# Altium PCB ADC(1).PcbDoc
Units mm, origin at the board's own origin, x right, y up, seen from the top; angles counter-clockwise.
Board outline 152.4 x 101.6 mm, 20 copper layers (F.Cu, F.Mask, B.Cu, B.Mask, In1.Cu, F.SilkS, In2.Cu, B.SilkS, F.Adhes, B.Adhes, F.Paste, B.Paste, Dwgs.User, Cmts.User, Eco1.User, Eco2.User, Edge.Cuts, Margin, B.CrtYd, F.CrtYd); 28 components, 48 nets, 160 pads, 53 vias.
Unrouted connection lines stored in the file: 36.
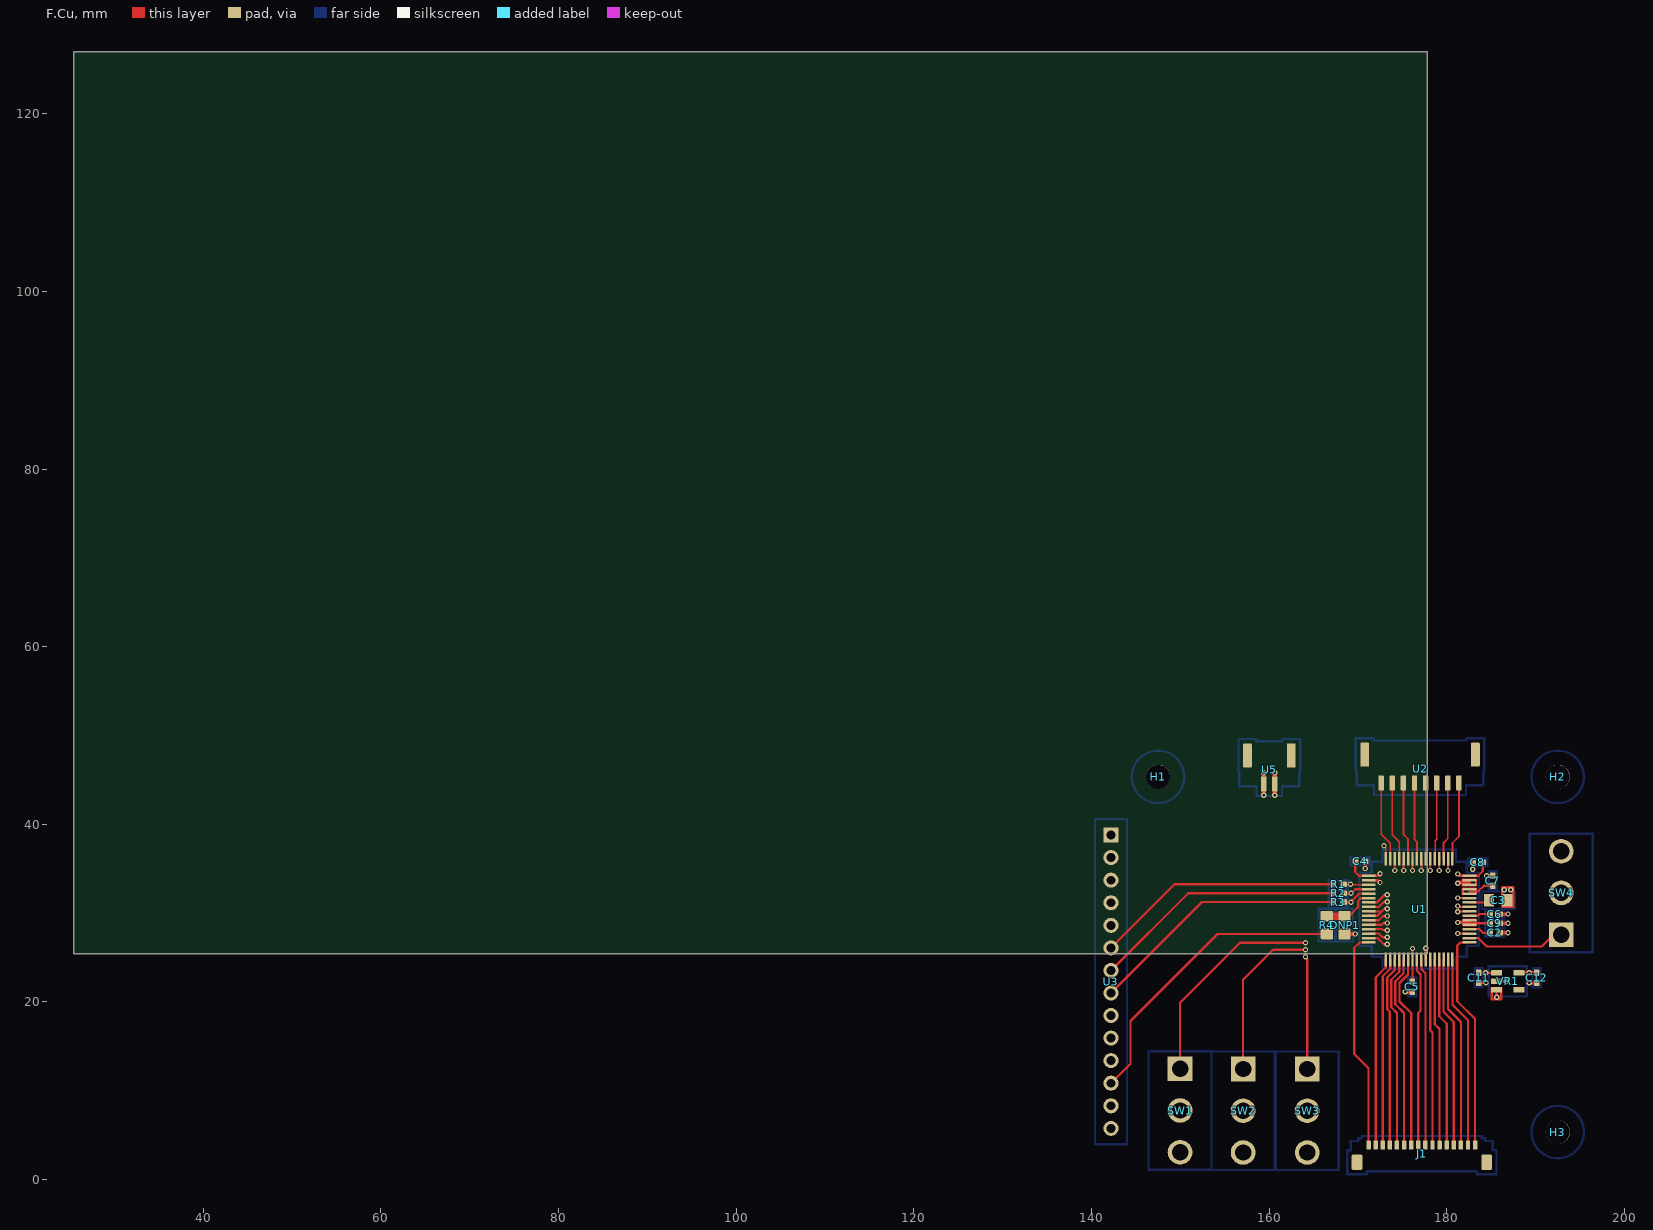
[diagram p0: F.Cu view]
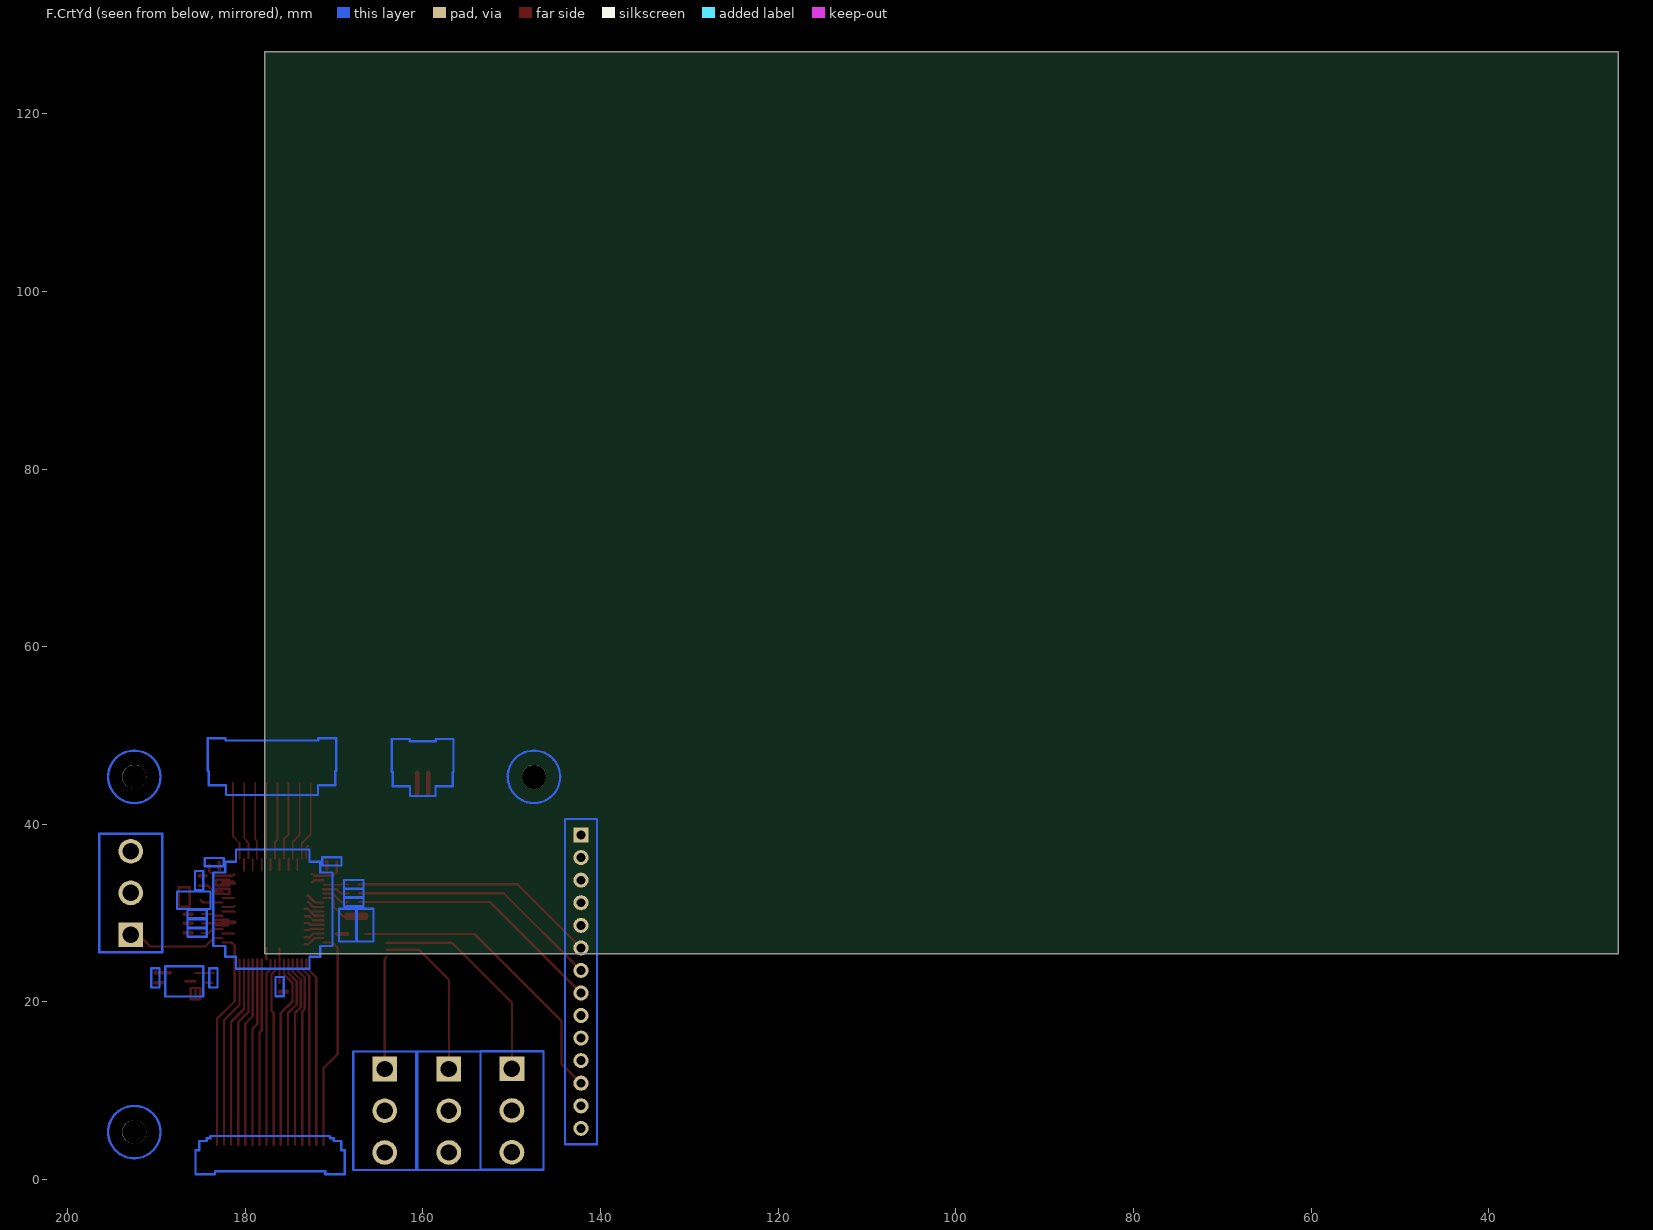
[diagram p1: F.CrtYd view, seen from below]
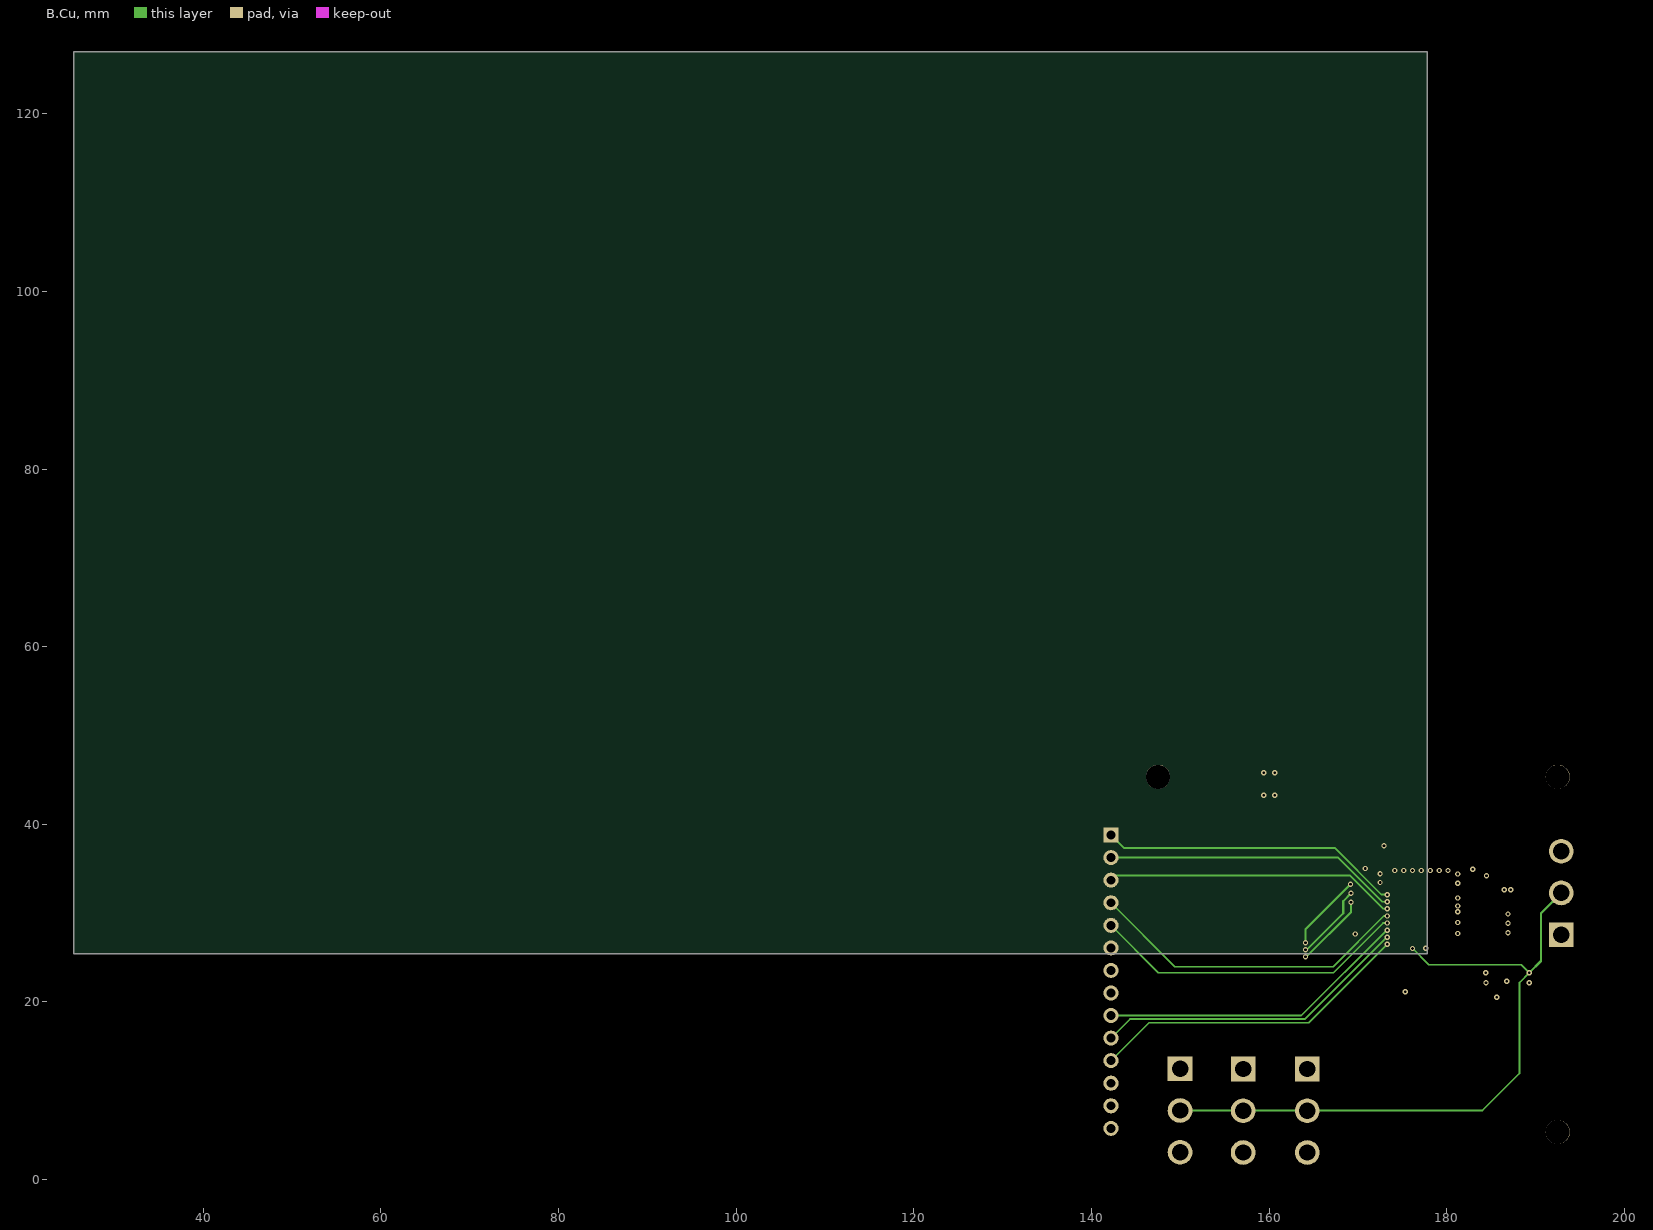
[diagram p2: B.Cu]
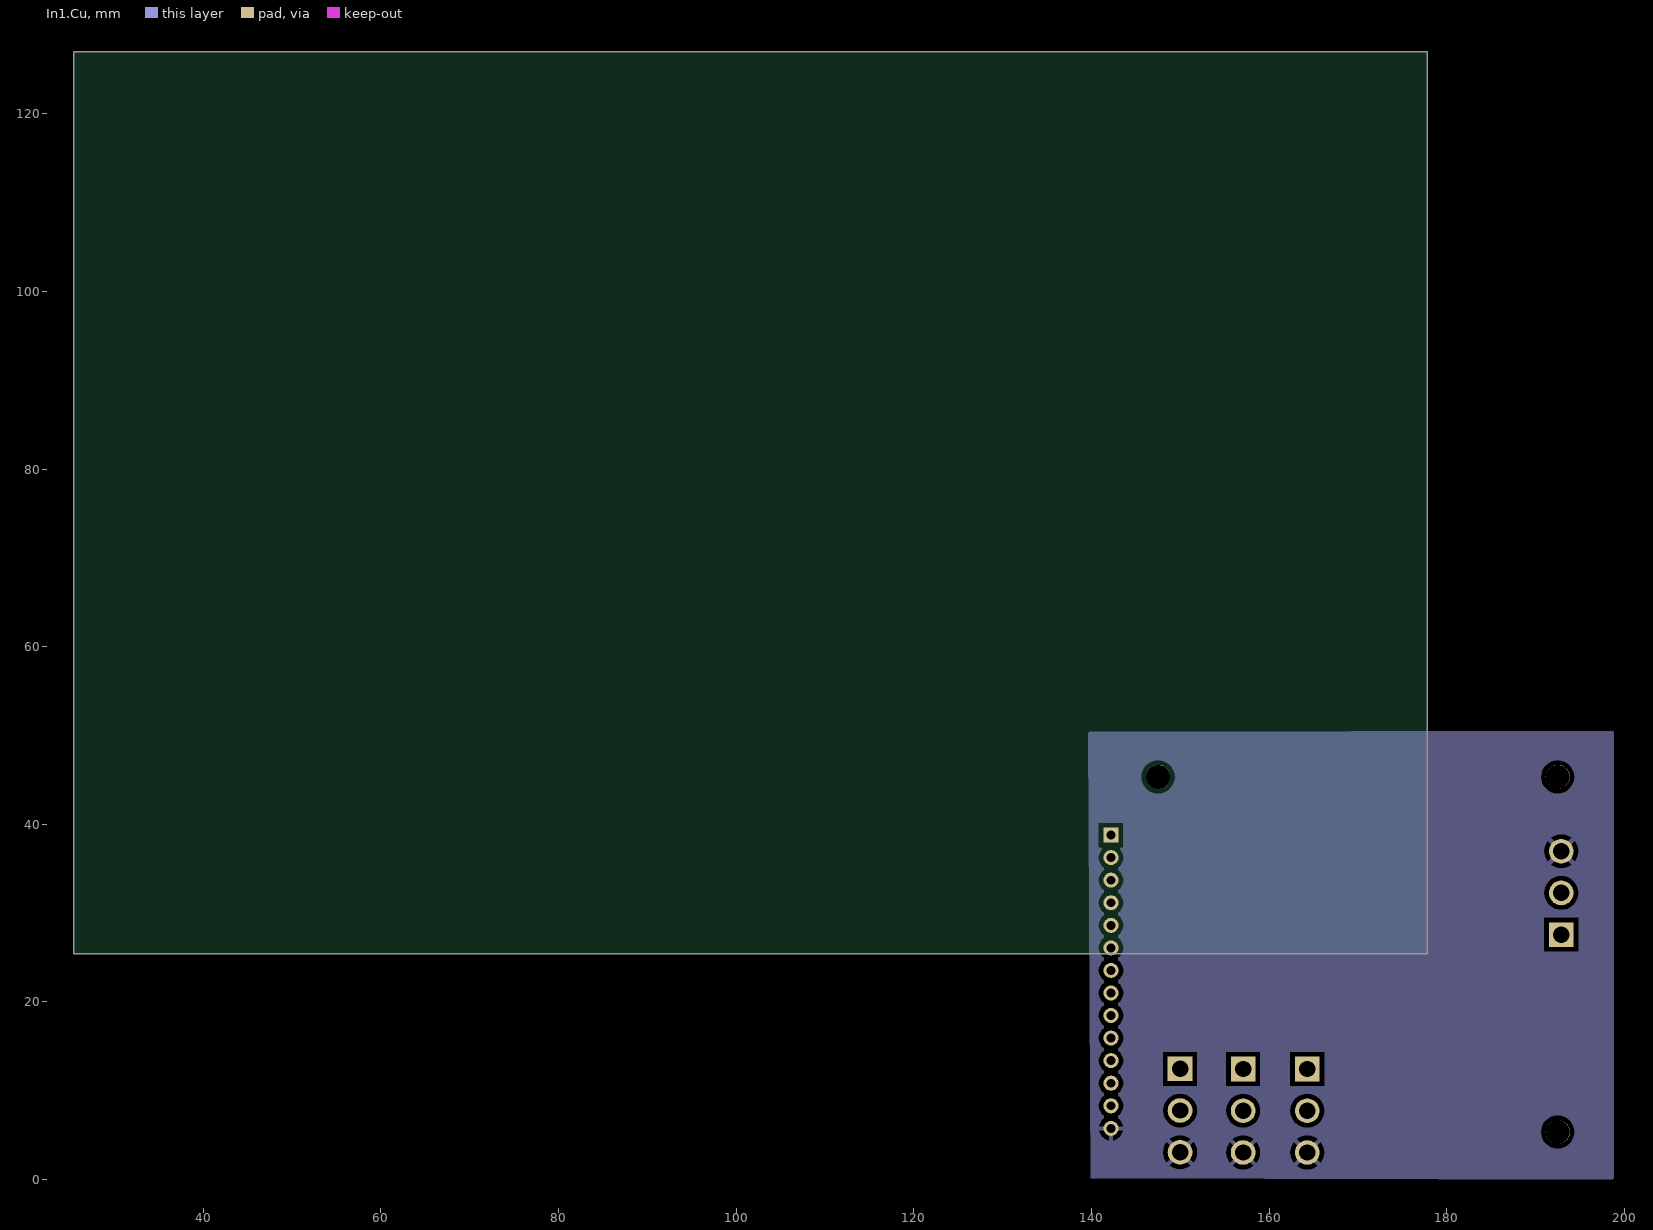
[diagram p3: In1.Cu]
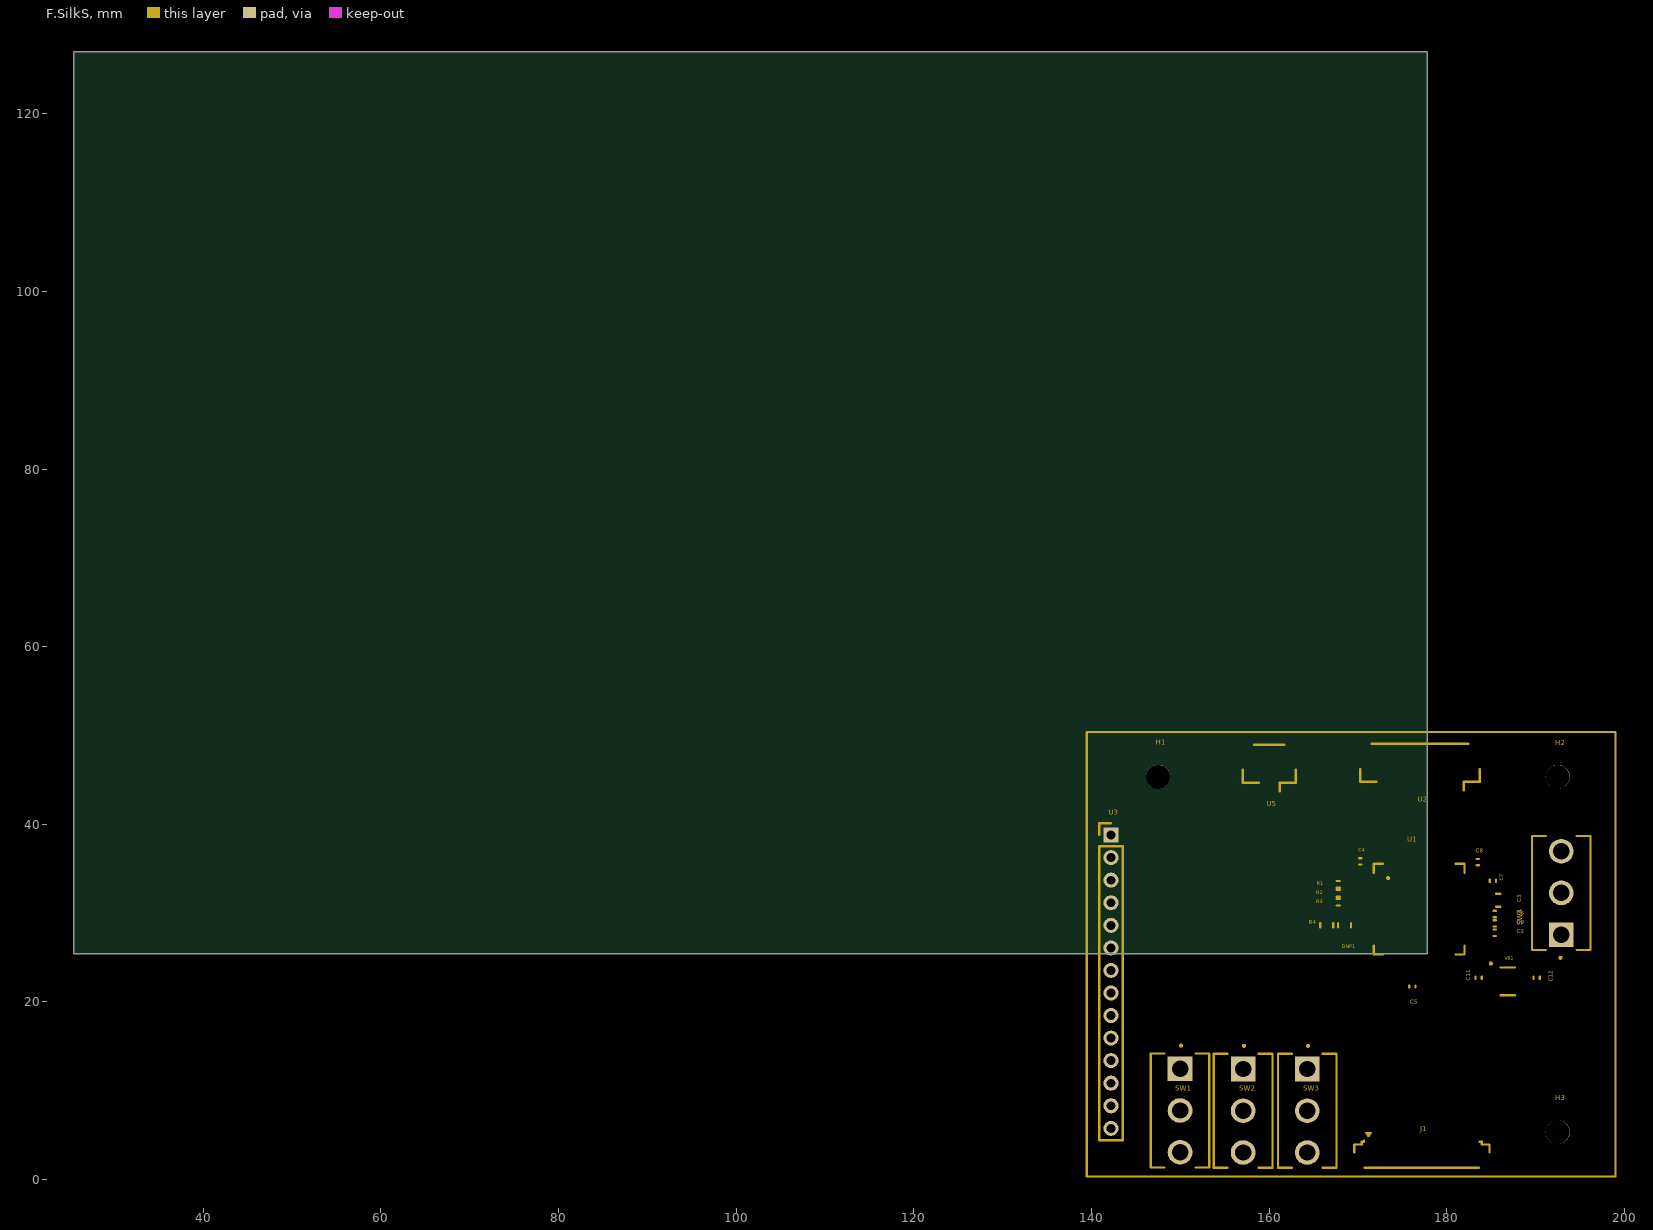
[diagram p4: F.SilkS]
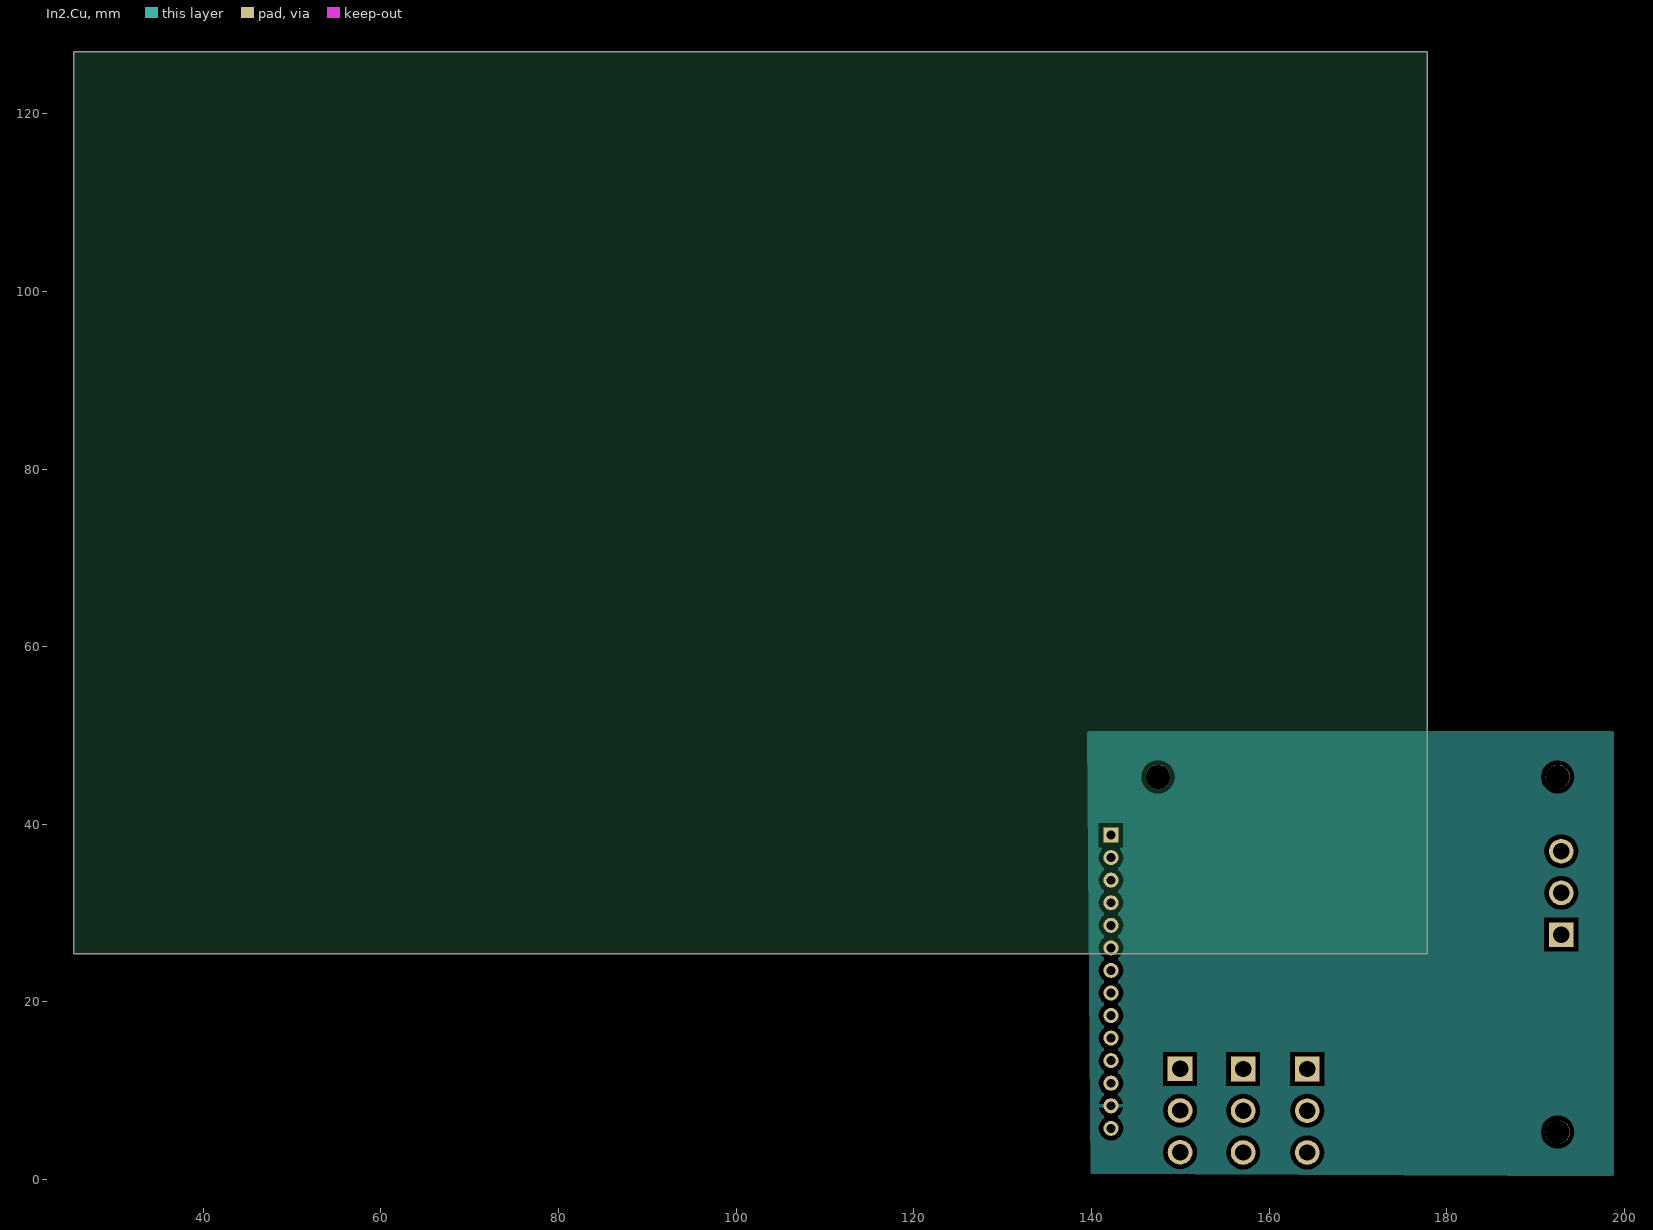
[diagram p5: In2.Cu]
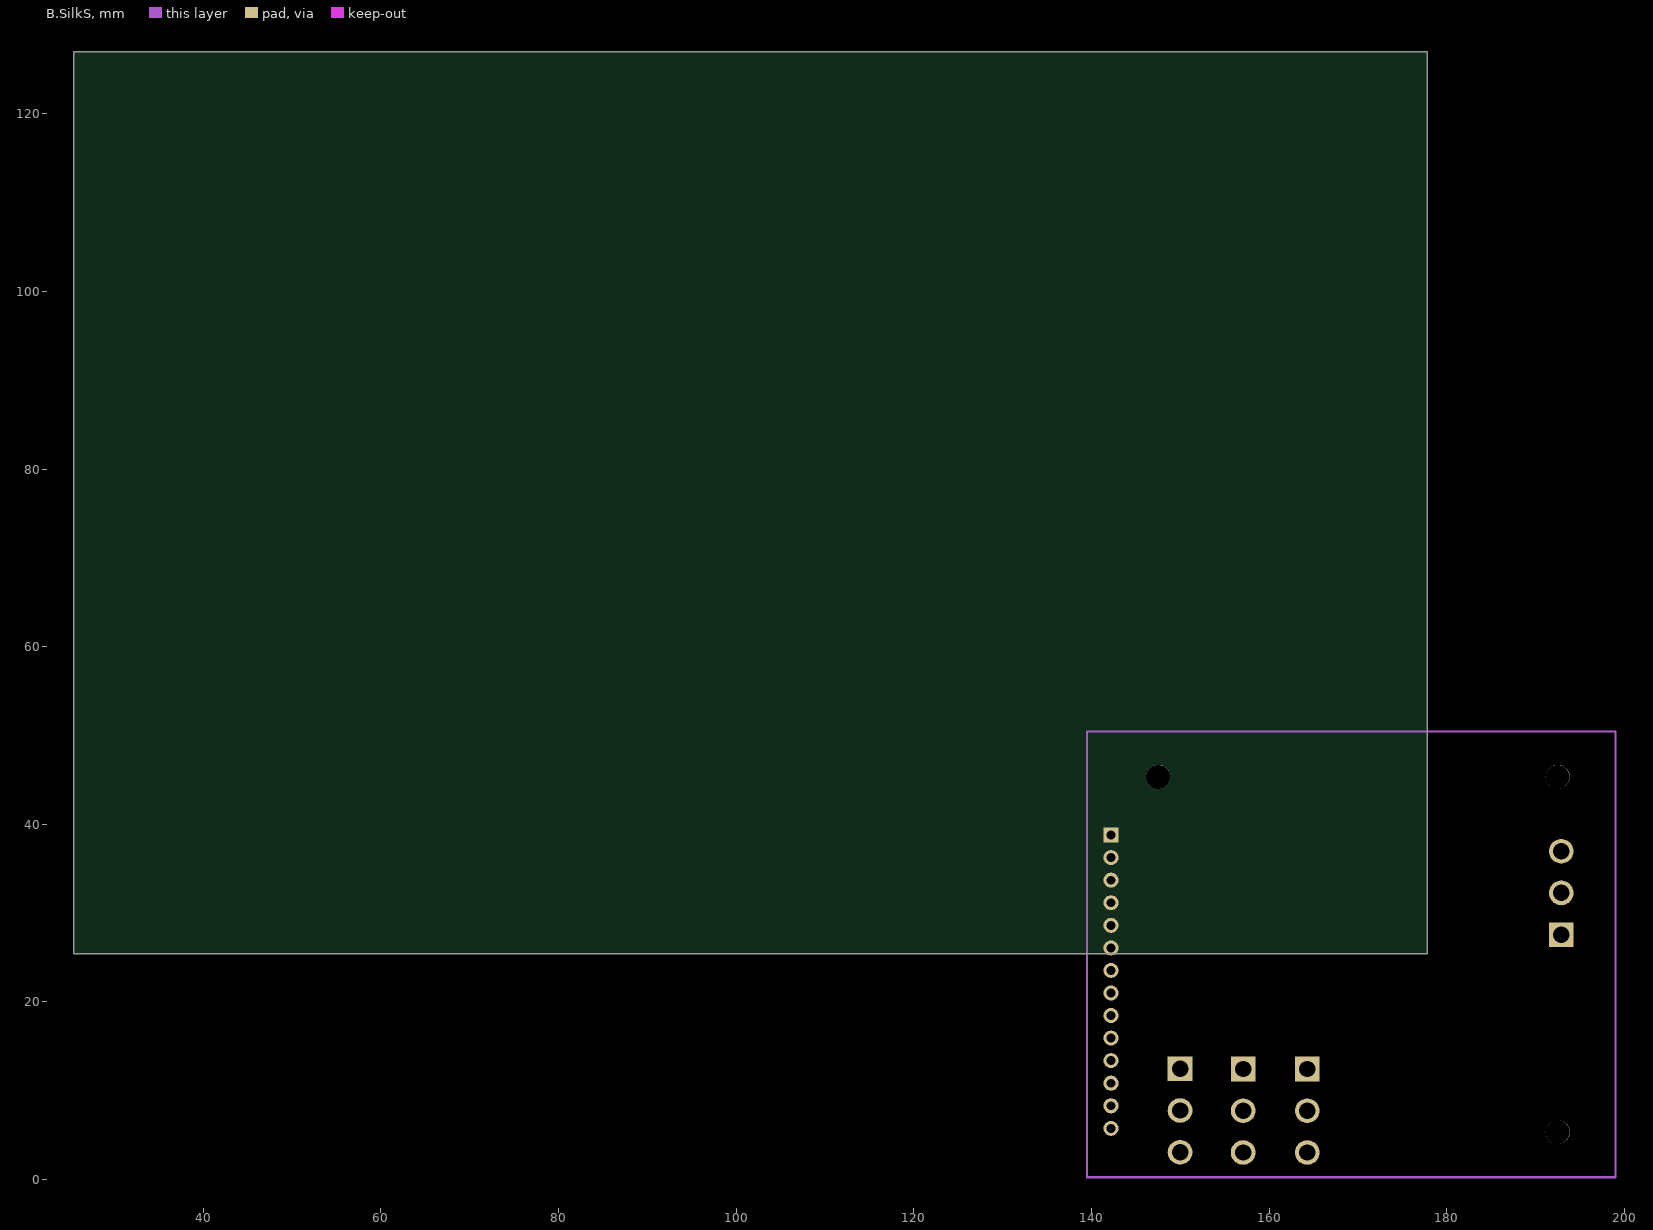
[diagram p6: B.SilkS]
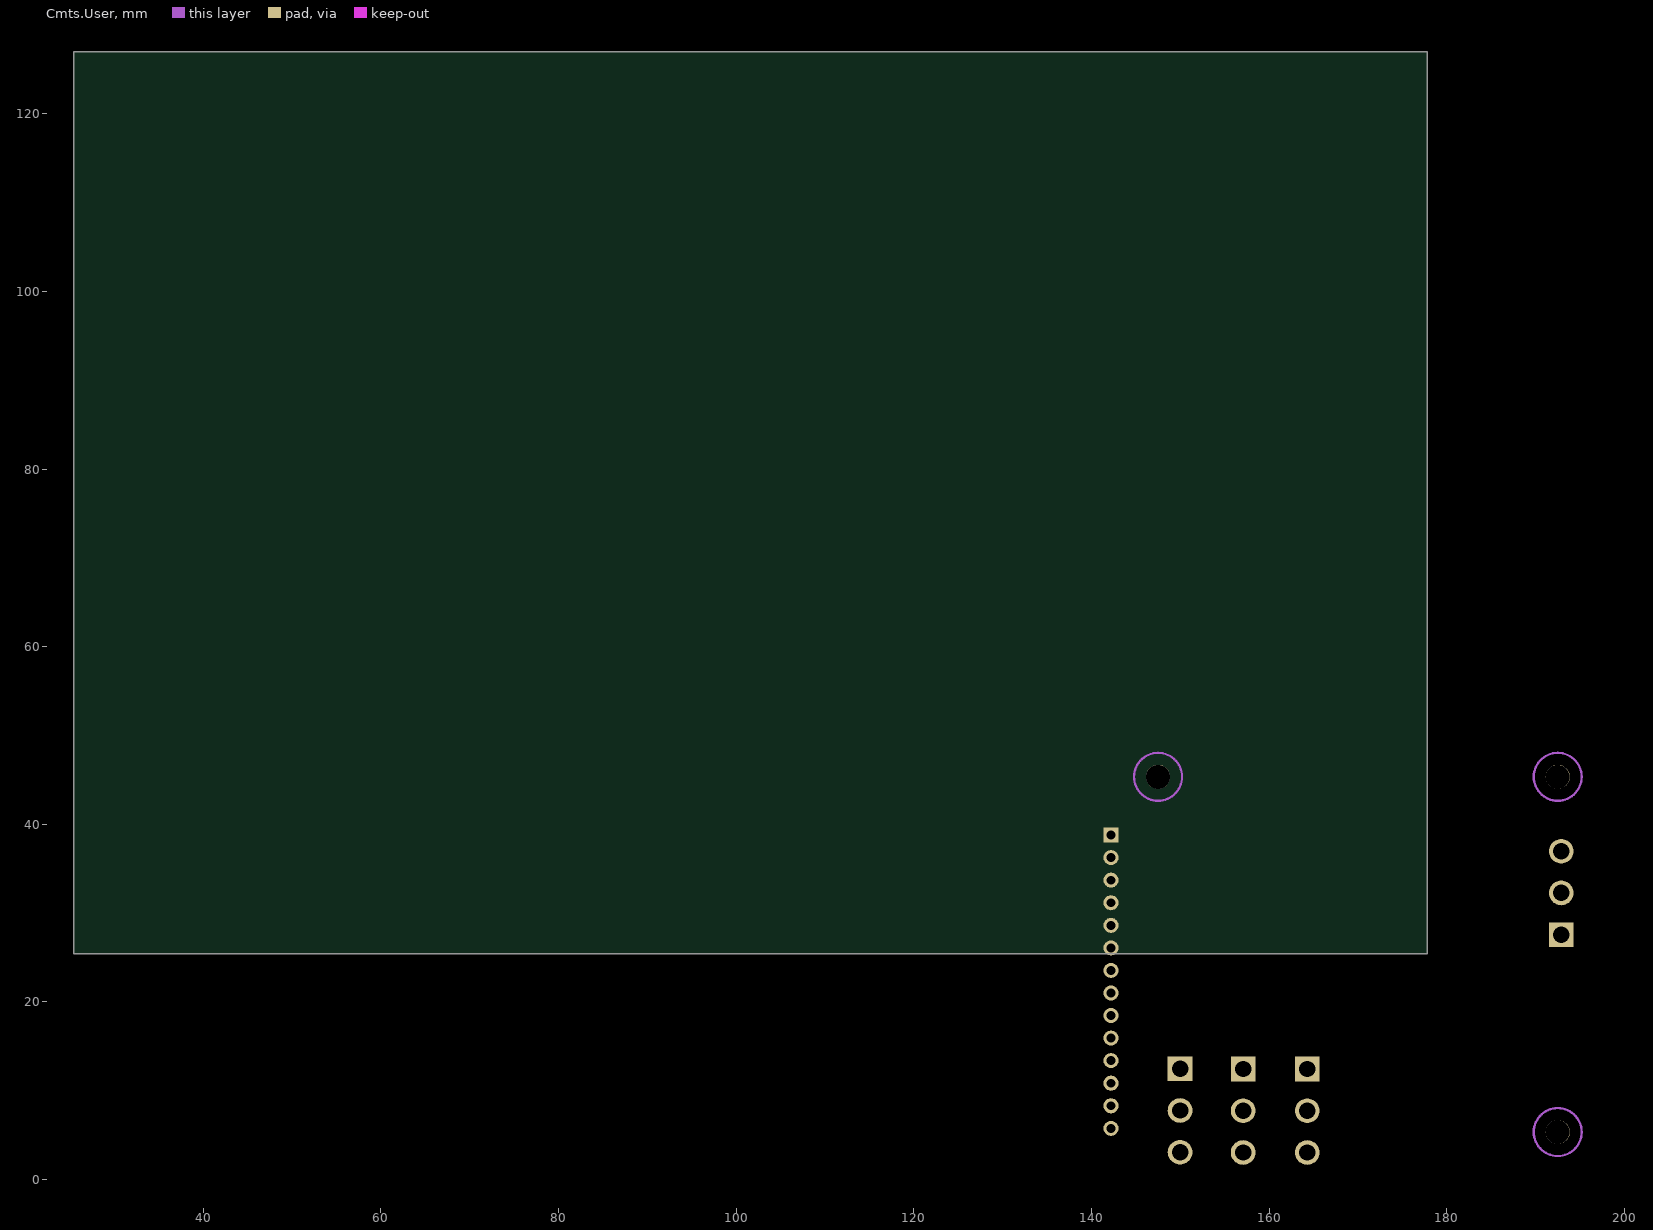
[diagram p7: Cmts.User]
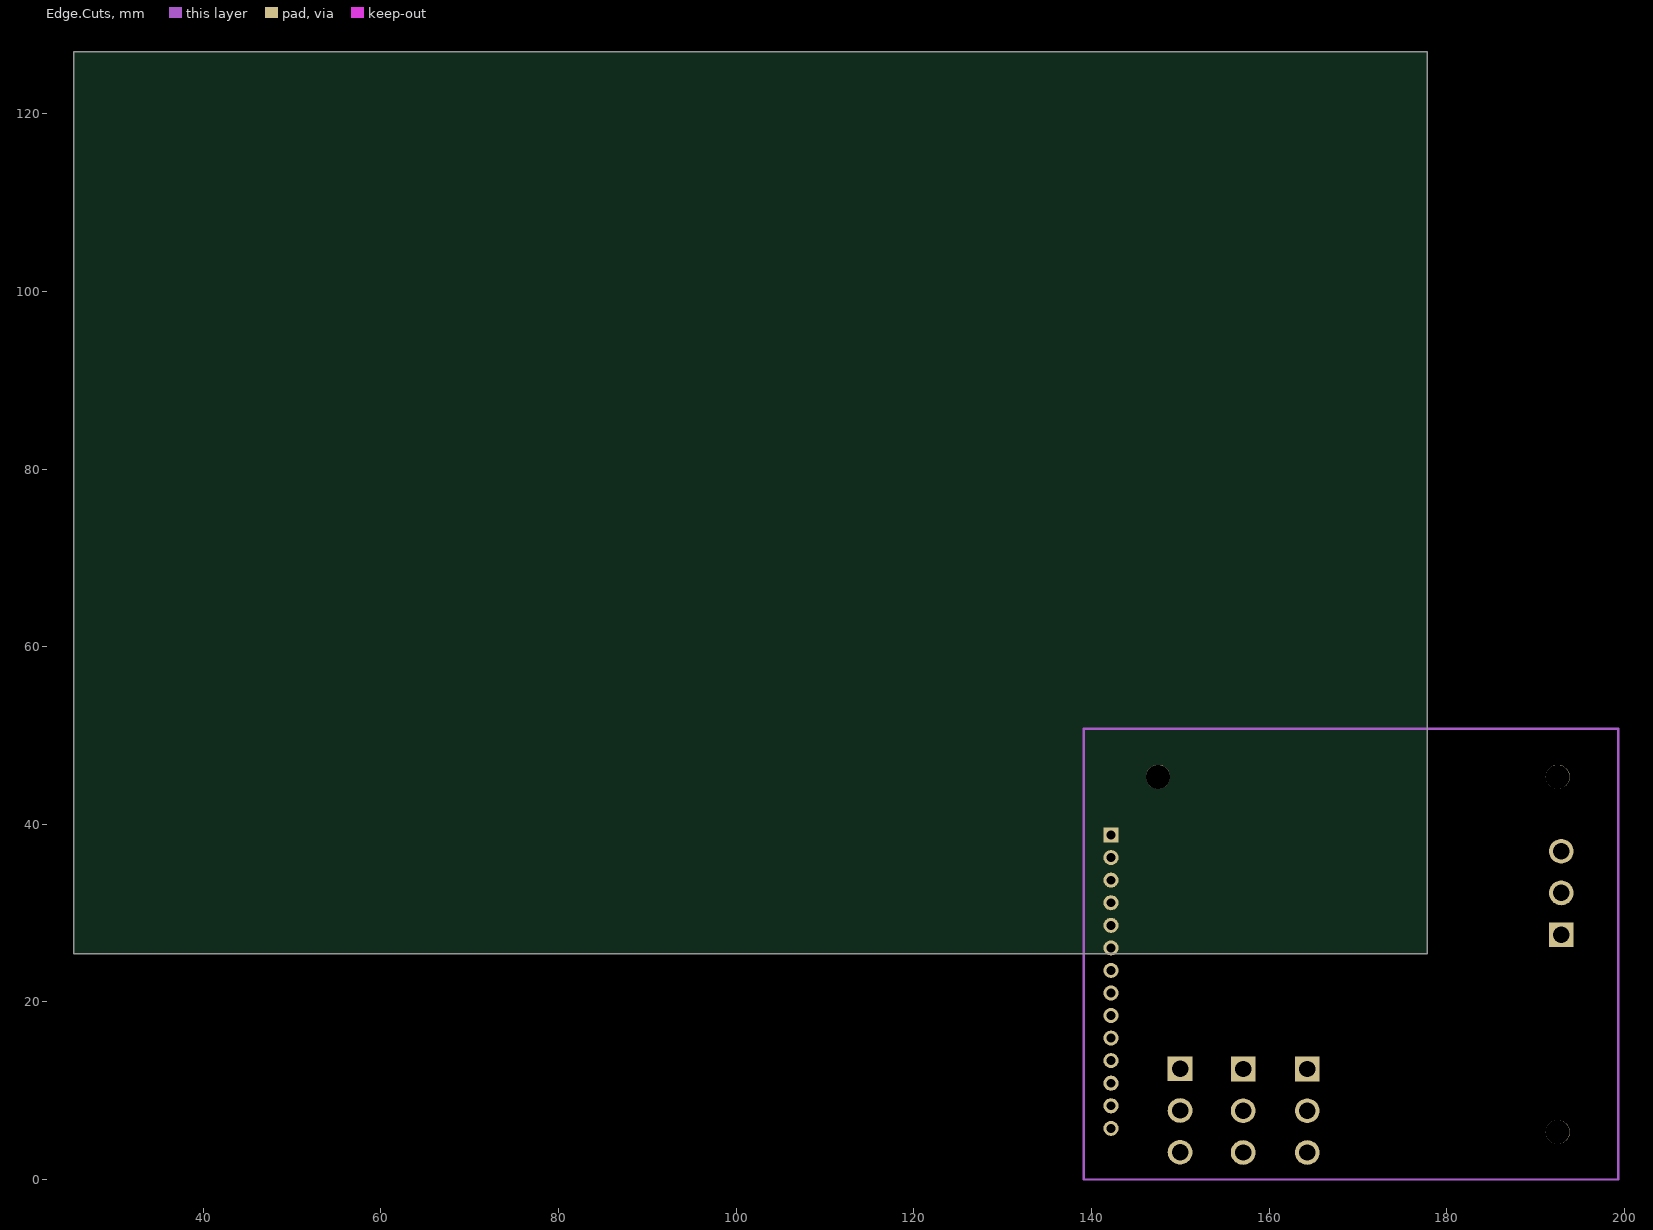
[diagram p8: Edge.Cuts]

## Layer stack, top to bottom
Top Solder: solder mask 0.0102, Solder Resist, Dk 3.5
F.Cu: signal copper 0.0356
Dielectric 1: dielectric 0.32, FR-4, Dk 4.8
F.Mask: signal copper 0.0356
Dielectric2: dielectric 0.32, FR-4, Dk 4.8
B.Cu: signal copper 0.0356
Dielectric3: dielectric 0.32, FR-4, Dk 4.8
B.Mask: signal copper 0.0356
Dielectric4: dielectric 0.32, FR-4, Dk 4.8
In1.Cu: signal copper 0.0356
Dielectric5: dielectric 0.32, FR-4, Dk 4.8
F.SilkS: signal copper 0.0356
Dielectric6: dielectric 0.32, FR-4, Dk 4.8
In2.Cu: signal copper 0.0356
Dielectric7: dielectric 0.32, FR-4, Dk 4.8
B.SilkS: signal copper 0.0356
Dielectric8: dielectric 0.32, FR-4, Dk 4.8
F.Adhes: signal copper 0.0356
Dielectric9: dielectric 0.32, FR-4, Dk 4.8
B.Adhes: signal copper 0.0356
Dielectric10: dielectric 0.32, FR-4, Dk 4.8
F.Paste: signal copper 0.0356
Dielectric11: dielectric 0.32, FR-4, Dk 4.8
B.Paste: signal copper 0.0356
Dielectric12: dielectric 0.32, FR-4, Dk 4.8
Dwgs.User: signal copper 0.0356
Dielectric13: dielectric 0.32, FR-4, Dk 4.8
Cmts.User: signal copper 0.0356
Dielectric14: dielectric 0.32, FR-4, Dk 4.8
Eco1.User: signal copper 0.0356
Dielectric15: dielectric 0.32, FR-4, Dk 4.8
Eco2.User: signal copper 0.0356
Dielectric16: dielectric 0.32, FR-4, Dk 4.8
Edge.Cuts: signal copper 0.0356
Dielectric17: dielectric 0.32, FR-4, Dk 4.8
Margin: signal copper 0.0356
Dielectric18: dielectric 0.32, FR-4, Dk 4.8
B.CrtYd: signal copper 0.0356
Dielectric19: dielectric 0.32, FR-4, Dk 4.8
F.CrtYd: signal copper 0.0356
Bottom Solder: solder mask 0.0102, Solder Resist, Dk 3.5

## Board outline
25.4,25.4 177.8,25.4 177.8,127 25.4,127

## Design rules (kind name [scope] priority, off if disabled: settings)
Clearance "Clearence 0.5_Polygon" [InNamedPolygon('In1.Cu-GND') OR InNamedPolygon('In2.Cu-+5V')] p1: gap=0.5 ignorepadtopadclearanceinfootprint=FALSE
MinimumSolderMaskSliver [All] p1: minsoldermaskwidth=0
PolygonConnect Polygon_In2.Cu-+5V_ConnectDirect [IsNamedPolygon('In2.Cu-+5V') vs IsVia] p1: connectstyle=Direct reliefconductorwidth=0.254 reliefentries=4 polygonreliefangle="90 Angle" airgapwidth=0.254
PolygonConnect Polygon_In2.Cu-+5V_ConnectRelief45 [IsNamedPolygon('In2.Cu-+5V') vs (IsThruPin or IsSMTPin) and (PadShape_AllLayers = 'Round')] p2: connectstyle=Relief reliefconductorwidth=0.5 reliefentries=4 polygonreliefangle="45 Angle" airgapwidth=0.5
PolygonConnect Polygon_In2.Cu-+5V_ConnectRelief90 [IsNamedPolygon('In2.Cu-+5V') vs (IsThruPin or IsSMTPin) and (PadShape_AllLayers <> 'Round')] p3: connectstyle=Relief reliefconductorwidth=0.5 reliefentries=4 polygonreliefangle="90 Angle" airgapwidth=0.5
PolygonConnect Polygon_In1.Cu-GND_ConnectDirect [IsNamedPolygon('In1.Cu-GND') vs IsVia] p4: connectstyle=Direct reliefconductorwidth=0.254 reliefentries=4 polygonreliefangle="90 Angle" airgapwidth=0.254
PolygonConnect Polygon_In1.Cu-GND_ConnectRelief45 [IsNamedPolygon('In1.Cu-GND') vs (IsThruPin or IsSMTPin) and (PadShape_AllLayers = 'Round')] p5: connectstyle=Relief reliefconductorwidth=0.5 reliefentries=4 polygonreliefangle="45 Angle" airgapwidth=0.5
PolygonConnect Polygon_In1.Cu-GND_ConnectRelief90 [IsNamedPolygon('In1.Cu-GND') vs (IsThruPin or IsSMTPin) and (PadShape_AllLayers <> 'Round')] p6: connectstyle=Relief reliefconductorwidth=0.5 reliefentries=4 polygonreliefangle="90 Angle" airgapwidth=0.5
RoutingVias [All] p1: holewidth=0.711 width=1.27 viastyle="Through Hole" minholewidth=0.711 minwidth=1.27 maxholewidth=0.711 maxwidth=1.27
SilkToSilkClearance [All] p1: silktosilkclearance=0
SilkToSolderMaskClearance [IsPad] p1: minsilkscreentomaskgap=0 clearancetoexposedcopper=TRUE
SolderMaskExpansion [All] p1: expansion=0.102 istentingtop=FALSE
Width [All] p1: maxlimit=10 minlimit=0.254 preferedwidth=0.254 midlayer1_maxwidth=0.254 midlayer3_maxwidth=0.254 midlayer9_maxwidth=0.254 midlayer11_maxwidth=0.254 midlayer13_maxwidth=0.254 midlayer15_maxwidth=0.254 midlayer17_maxwidth=0.254 midlayer21_maxwidth=0.254 midlayer23_maxwidth=0.254 midlayer27_maxwidth=0.254 midlayer29_maxwidth=0.254 minimp=50.000000 maximp=50.000000 favimp=50.000000
27 further rules are at their usual default settings.

## Components (designator, comment, footprint, x,y, rotation, side; value= is the part's Value field where it differs from the comment)
C2 "Comment" C_0402_1005Metric_Pad0.74x0.62mm_HandSolder 185.418,27.8 r180 top value=1uF
C3 "Comment" C_0805_2012Metric_Pad1.18x1.45mm_HandSolder 185.8,31.45 r180 top value=10uF
C4 "Comment" C_0402_1005Metric_Pad0.74x0.62mm_HandSolder 170.258,35.825 r180 top value=0.1uF
C5 "Comment" C_0402_1005Metric_Pad0.74x0.62mm_HandSolder 176.134,21.733 r90 top value=0.1uF
C6 "Comment" C_0402_1005Metric_Pad0.74x0.62mm_HandSolder 185.418,29.9 r180 top value=1uF
C7 "Comment" C_0402_1005Metric_Pad0.74x0.62mm_HandSolder 185.2,33.657 r90 top value=1uF
C8 "Comment" C_0402_1005Metric_Pad0.74x0.62mm_HandSolder 183.5,35.744 r0 top value=0.1uF
C9 "Comment" C_0402_1005Metric_Pad0.74x0.62mm_HandSolder 185.418,28.85 r180 top value=0.1uF
C11 "Comment" C_0402_1005Metric_Pad0.74x0.62mm_HandSolder 183.6,22.718 r270 top value=1uF
C12 "Comment" C_0402_1005Metric_Pad0.74x0.62mm_HandSolder 190.123,22.718 r270 top value=1uF
DNP1 "Comment" R_0805_2012Metric_Pad1.20x1.40mm_HandSolder 168.495,28.65 r270 top value=10-47k
H1 "Comment" MountingHole_2.7mm_M2.5 147.5,45.35 r0 top value=MountingHole
H2 "Comment" MountingHole_2.7mm_M2.5 192.5,45.35 r0 top value=MountingHole
H3 "Comment" MountingHole_2.7mm_M2.5 192.5,5.35 r0 top value=MountingHole
J1 "Comment" JST_SUR_SM16B-SURS-TF_1x16-1MP_P0.80mm_Horizontal 177.2,2.75 r0 top value=H_16_2.54mm
R1 "Comment" R_0402_1005Metric_Pad0.72x0.64mm_HandSolder 167.8,33.25 r0 top value=1k
R2 "Comment" R_0402_1005Metric_Pad0.72x0.64mm_HandSolder 167.8,32.25 r0 top value=1k
R3 "Comment" R_0402_1005Metric_Pad0.72x0.64mm_HandSolder 167.8,31.25 r0 top value=1k
R4 "Comment" R_0805_2012Metric_Pad1.20x1.40mm_HandSolder 166.505,28.65 r90 top value=1k
SW1 "Comment" switch1 149.975,7.775 r270 top value=SW_Reed_SPDT
SW2 "Comment" switch1 157.075,7.75 r270 top value=SW_Reed_SPDT
SW3 "Comment" switch1 164.3,7.75 r270 top value=SW_Reed_SPDT
SW4 "Comment" switch1 192.9,32.275 r90 top value=SW_Reed_SPDT
U1 "Comment" AD7606BSTZ 176.9,30.45 r0 top value=AD7606BSTZ
U2 "Comment" JST_GH_SM08B-GHS-TB_1x08-1MP_P1.25mm_Horizontal 177,46.5 r180 top value=~
U3 "Comment" PinHeader_1x14_P2.54mm_Vertical 142.2,38.79 r0 top value=~
U5 "Comment" JST_GH_SM02B-GHS-TB_1x02-1MP_P1.25mm_Horizontal 160.025,46.4 r180 top value=~
VR1 "Comment" TLV70033DDCR 186.875,22.325 r0 top value=TLV70033DDCR

## Footprints (in the part's own frame and the unit in brackets; to place one, negate y for a bottom-side part, rotate by r counter-clockwise, add the part's x,y. Pads: shape width x height; smd on the part's side, far side on the other; paste and mask are expansions set on the pad)
AD7606BSTZ [mm]
  rrect8% 1.56x0.28 smd paste-1.56 mask-1.56: 1(-5.68,3.75) 2(-5.68,3.25) 3(-5.68,2.75) 4(-5.68,2.25) 5(-5.68,1.75) 6(-5.68,1.25) 7(-5.68,0.75) 8(-5.68,0.25) 9(-5.68,-0.25) 10(-5.68,-0.75) 11(-5.68,-1.25) 12(-5.68,-1.75) 13(-5.68,-2.25) 14(-5.68,-2.75) 15(-5.68,-3.25) 16(-5.68,-3.75) 33(5.68,-3.75) 34(5.68,-3.25) 35(5.68,-2.75) 36(5.68,-2.25) 37(5.68,-1.75) 38(5.68,-1.25) 39(5.68,-0.75) 40(5.68,-0.25) 41(5.68,0.25) 42(5.68,0.75) 43(5.68,1.25) 44(5.68,1.75) 45(5.68,2.25) 46(5.68,2.75) 47(5.68,3.25) 48(5.68,3.75)
  rrect8% 0.28x1.56 smd paste-1.56 mask-1.56: 17(-3.75,-5.68) 18(-3.25,-5.68) 19(-2.75,-5.68) 20(-2.25,-5.68) 21(-1.75,-5.68) 22(-1.25,-5.68) 23(-0.75,-5.68) 24(-0.25,-5.68) 25(0.25,-5.68) 26(0.75,-5.68) 27(1.25,-5.68) 28(1.75,-5.68) 29(2.25,-5.68) 30(2.75,-5.68) 31(3.25,-5.68) 32(3.75,-5.68) 49(3.75,5.68) 50(3.25,5.68) 51(2.75,5.68) 52(2.25,5.68) 53(1.75,5.68) 54(1.25,5.68) 55(0.75,5.68) 56(0.25,5.68) 57(-0.25,5.68) 58(-0.75,5.68) 59(-1.25,5.68) 60(-1.75,5.68) 61(-2.25,5.68) 62(-2.75,5.68) 63(-3.25,5.68) 64(-3.75,5.68)
  F.SilkS circle w0.254: c-3.5,3.5 r0.1
  F.SilkS lines w0.254: -5.1,-4.1 -5.1,-5.1 -4.1,-5.1 ; -5.1,4.1 -5.1,5.1 -4.1,5.1 ; 4.1,-5.1 5.1,-5.1 5.1,-4.1 ; 4.1,5.1 5.1,5.1 5.1,4.1
  F.CrtYd lines w0.254: -6.71,-4.14 -6.71,4.14 -5.35,4.14 -5.35,5.35 -4.14,5.35 -4.14,6.71 4.14,6.71 4.14,5.35 5.35,5.35 5.35,4.14 6.71,4.14 6.71,-4.14 5.35,-4.14 5.35,-5.35 4.14,-5.35 4.14,-6.71 -4.14,-6.71 -4.14,-5.35 -5.35,-5.35 -5.35,-4.14 -6.71,-4.14
C_0402_1005Metric_Pad0.74x0.62mm_HandSolder [mm]
  rrect25% 0.735x0.62 smd paste-0.735 mask-0.735: 1(-0.567,0) 2(0.567,0)
  F.SilkS lines w0.254: 0.116,0.36 -0.116,0.36 ; 0.116,-0.36 -0.116,-0.36
  F.CrtYd lines w0.254: 1.08,0.46 -1.08,0.46 -1.08,-0.46 1.08,-0.46 1.08,0.46
C_0805_2012Metric_Pad1.18x1.45mm_HandSolder [mm]
  rrect21% 1.175x1.45 smd paste-1.45 mask-1.45: 1(-1.038,0) 2(1.038,0)
  F.SilkS lines w0.254: 0.261,0.735 -0.261,0.735 ; 0.261,-0.735 -0.261,-0.735
  F.CrtYd lines w0.254: 1.88,0.98 -1.88,0.98 -1.88,-0.98 1.88,-0.98 1.88,0.98
JST_GH_SM02B-GHS-TB_1x02-1MP_P1.25mm_Horizontal [mm]
  rrect25% 0.6x1.7 smd paste-1.7 mask-1.7: 1(-0.625,1.85) 2(0.625,1.85)
  rrect25% 1x2.7 smd paste-2.7 mask-2.7: MP(-2.475,-1.35) MP(2.475,-1.35)
  F.SilkS lines w0.254: 2.985,0.26 2.985,1.71 1.185,1.71 ; 1.715,-2.56 -1.715,-2.56 ; -1.185,2.7 -1.185,1.71 -2.985,1.71 -2.985,0.26
  F.CrtYd lines w0.254: 3.48,0.5 3.48,-3.2 1.47,-3.2 1.47,-2.95 -1.47,-2.95 -1.47,-3.2 -3.48,-3.2 -3.48,0.5 -3.38,0.5 -3.38,2.1 -1.43,2.1 -1.43,3.2 1.43,3.2 1.43,2.1 3.38,2.1 3.38,0.5 3.48,0.5
JST_GH_SM08B-GHS-TB_1x08-1MP_P1.25mm_Horizontal [mm]
  rrect25% 0.6x1.7 smd paste-1.7 mask-1.7: 1(-4.375,1.85) 2(-3.125,1.85) 3(-1.875,1.85) 4(-0.625,1.85) 5(0.625,1.85) 6(1.875,1.85) 7(3.125,1.85) 8(4.375,1.85)
  rrect25% 1x2.7 smd paste-2.7 mask-2.7: MP(-6.225,-1.35) MP(6.225,-1.35)
  F.SilkS lines w0.254: 6.735,0.26 6.735,1.71 4.935,1.71 ; 5.465,-2.56 -5.465,-2.56 ; -4.935,2.7 -4.935,1.71 -6.735,1.71 -6.735,0.26
  F.CrtYd lines w0.254: 7.23,0.5 7.23,-3.2 5.22,-3.2 5.22,-2.95 -5.22,-2.95 -5.22,-3.2 -7.23,-3.2 -7.23,0.5 -7.13,0.5 -7.13,2.1 -5.18,2.1 -5.18,3.2 5.18,3.2 5.18,2.1 7.13,2.1 7.13,0.5 7.23,0.5
JST_SUR_SM16B-SURS-TF_1x16-1MP_P0.80mm_Horizontal [mm]
  rrect25% 0.5x1 smd paste-1 mask-1: 1(-6,1.15) 2(-5.2,1.15) 3(-4.4,1.15) 4(-3.6,1.15) 5(-2.8,1.15) 6(-2,1.15) 7(-1.2,1.15) 8(-0.4,1.15) 9(0.4,1.15) 10(1.2,1.15) 11(2,1.15) 12(2.8,1.15) 13(3.6,1.15) 14(4.4,1.15) 15(5.2,1.15) 16(6,1.15)
  rrect21% 1.2x1.7 smd paste-1.7 mask-1.7: MP(-7.3,-0.8) MP(7.3,-0.8)
  F.SilkS lines w0.254: -7.61,0.31 -7.61,1.21 -6.76,1.21 -6.76,1.51 -6.51,1.51 -6.51,1.65 ; -6.44,-1.41 6.44,-1.41 ; 6.51,1.51 6.76,1.51 6.76,1.21 7.61,1.21 7.61,0.31 ; -6.25,2.504 -5.75,2.504 -6,2.15 -6.25,2.504
  F.CrtYd lines w0.254: -8.4,-2.15 -8.4,0.55 -8,0.55 -8,1.6 -7.15,1.6 -7.15,1.9 -6.75,1.9 -6.75,2.15 6.75,2.15 6.75,1.9 7.15,1.9 7.15,1.6 8,1.6 8,0.55 8.4,0.55 8.4,-2.15 6.2,-2.15 6.2,-1.8 -6.2,-1.8 -6.2,-2.15 -8.4,-2.15
MountingHole_2.7mm_M2.5 [mm]
  round 2.7 hole 2.7 paste-2539.97 mask-2.7: Un1(0,0)
  Cmts.User circle w0.254: c0,0 r2.7
  F.CrtYd circle w0.254: c0,0 r2.95
PinHeader_1x14_P2.54mm_Vertical [mm]
  rect 1.7x1.7 hole 1 paste-2539.97 mask-1.7: 1(0,0)
  rrect100% 1.7x1.7 hole 1 paste-2539.97 mask-1.7: 2(0,-2.54) 3(0,-5.08) 4(0,-7.62) 5(0,-10.16) 6(0,-12.7) 7(0,-15.24) 8(0,-17.78) 9(0,-20.32) 10(0,-22.86) 11(0,-25.4) 12(0,-27.94) 13(0,-30.48) 14(0,-33.02)
  F.SilkS lines w0.254: -1.33,0 -1.33,1.33 0,1.33 ; -1.33,-34.35 1.33,-34.35 1.33,-1.27 -1.33,-1.27 -1.33,-34.35
  F.CrtYd lines w0.254: -1.8,-34.8 1.8,-34.8 1.8,1.8 -1.8,1.8 -1.8,-34.8
R_0402_1005Metric_Pad0.72x0.64mm_HandSolder [mm]
  rrect25% 0.715x0.64 smd paste-0.715 mask-0.715: 1(-0.597,0) 2(0.597,0)
  F.SilkS lines w0.254: -0.168,-0.38 0.168,-0.38 ; -0.168,0.38 0.168,0.38
  F.CrtYd lines w0.254: -1.1,-0.47 1.1,-0.47 1.1,0.47 -1.1,0.47 -1.1,-0.47
R_0805_2012Metric_Pad1.20x1.40mm_HandSolder [mm]
  rrect21% 1.2x1.4 smd paste-1.4 mask-1.4: 1(-1,0) 2(1,0)
  F.SilkS lines w0.254: 0.227,-0.735 -0.227,-0.735 ; 0.227,0.735 -0.227,0.735
  F.CrtYd lines w0.254: 1.85,-0.95 1.85,0.95 -1.85,0.95 -1.85,-0.95 1.85,-0.95
switch1 [mm]
  rect 2.775x2.775 hole 1.85 paste-2539.97 mask-2.775: 1(-4.7,0)
  round 2.775 hole 1.85 paste-2539.97 mask-2.775: 2(0,0) 3(4.7,0)
  F.SilkS circle w0.254: c-7.3,0.1 r0.1
  F.SilkS lines w0.254: 6.425,-1.75 6.425,-3.3 -6.425,-3.3 -6.425,-1.75 ; 6.425,1.75 6.425,3.3 -6.425,3.3 -6.425,1.75
  F.CrtYd lines w0.254: 6.675,-3.55 6.675,3.55 -6.675,3.55 -6.675,-3.55 6.675,-3.55
TLV70033DDCR [mm]
  rrect12% 1.25x0.59 smd paste-1.25 mask-1.25: 1(-1.255,0.95) 2(-1.255,0) 3(-1.255,-0.95) 4(1.255,-0.95) 5(1.255,0.95)
  F.SilkS circle w0.254: c-1.9,2 r0.1
  F.SilkS lines w0.254: -0.8,-1.565 0.8,-1.565 ; -0.8,1.565 0.8,1.565
  F.CrtYd lines w0.254: -2.13,-1.7 2.13,-1.7 2.13,1.7 -2.13,1.7 -2.13,-1.7

## Part data
C2 C5 C6 C8 C9 C11 C12: library part C_0402_1005Metric_Pad0.74x0.62mm_HandSolder, "Capacitor SMD 0402 (1005 Metric), square (rectangular) end terminal, IPC_7351 nominal with elongated pad for handsoldering. (Body size source: IPC-SM-782 page 76, https://www.pcb-3d.com/wordpress/wp-content/uploads/ipc-sm-782a_amendment_1_and_2.pdf), generated with kicad-footprint-generator", Datasheet=~, Description="Unpolarized capacitor", ki_fp_filters=C_*
  C2 C6 C11 C12: Website=https://eu.mouser.com/ProductDetail/Murata-Electronics/GRM155Z71A105KE01D?qs=%252B6g0mu59x7LZ5VDL%2FTet%2Fg%3D%3D
  C5 C8 C9: Website=https://www.mouser.bg/ProductDetail/Murata-Electronics/GRM155R71H104KE14D?qs=2UZY3JfgLCy9gG9icKV9Yg%3D%3D
C3: library part C_0805_2012Metric_Pad1.18x1.45mm_HandSolder, "Capacitor SMD 0805 (2012 Metric), square (rectangular) end terminal, IPC_7351 nominal with elongated pad for handsoldering. (Body size source: IPC-SM-782 page 76, https://www.pcb-3d.com/wordpress/wp-content/uploads/ipc-sm-782a_amendment_1_and_2.pdf, https://docs.google.com/spreadsheets/d/1BsfQQcO9C6DZCsRaXUlFlo91Tg2WpOkGARC1WS5S8t0/edit?usp=sharing), generated with kicad-footprint-generator", Datasheet=~, Description="Unpolarized capacitor", Website=https://www.mouser.bg/ProductDetail/Murata-Electronics/GRM21BZ71E106KE15L?qs=Ey7%2FXF42M3fdXe9bIpCO9w%3D%3D, ki_fp_filters=C_*
C4 C7: library part C_0402_1005Metric_Pad0.74x0.62mm_HandSolder, "Capacitor SMD 0402 (1005 Metric), square (rectangular) end terminal, IPC-7351 nominal with elongated pad for handsoldering. (Body size source: IPC-SM-782 page 76, https://www.pcb-3d.com/wordpress/wp-content/uploads/ipc-sm-782a_amendment_1_and_2.pdf), generated with kicad-footprint-generator", Datasheet=~, Description="Unpolarized capacitor", ki_fp_filters=C_*
  C4: Website=https://www.mouser.bg/ProductDetail/Murata-Electronics/GRM155R71H104KE14D?qs=2UZY3JfgLCy9gG9icKV9Yg%3D%3D
  C7: Website=https://eu.mouser.com/ProductDetail/Murata-Electronics/GRM155Z71A105KE01D?qs=%252B6g0mu59x7LZ5VDL%2FTet%2Fg%3D%3D
DNP1 R4: library part R_0805_2012Metric_Pad1.20x1.40mm_HandSolder, "Resistor SMD 0805 (2012 Metric), square (rectangular) end terminal, IPC_7351 nominal with elongated pad for handsoldering. (Body size source: IPC-SM-782 page 72, https://www.pcb-3d.com/wordpress/wp-content/uploads/ipc-sm-782a_amendment_1_and_2.pdf), generated with kicad-footprint-generator", Datasheet=~, Description=Resistor, ki_fp_filters=R_*
  R4: Website=https://www.digikey.bg/en/products/detail/yageo/RC0805FR-071KL/727444
H1 H2 H3: library part MountingHole_2.7mm_M2.5, "Mounting Hole 2.7mm, M2.5, no annular, generated by kicad-footprint-generator mountinghole.py", Datasheet=~, Description="Mounting Hole without connection", ki_fp_filters=MountingHole*
J1: library part JST_SUR_SM16B-SURS-TF_1x16-1MP_P0.80mm_Horizontal, "JST SUR series connector, SM16B-SURS-TF (http://www.jst-mfg.com/product/pdf/eng/eSUR.pdf), generated with kicad-footprint-generator", Package=None, MANUFACTURER=Samtec, MF=Samtec, Description_1="\n                        \n                            MTSW - Samtec 2.54mm Variable Post Height Header  22 Lead Style\n                        \n", Price=None, Check_prices=https://www.snapeda.com/parts/MTSW-150-22-S-D-415/Samtec/view-part/?ref=eda, STANDARD="Manufacturer Recommendations", PARTREV=R, SnapEDA_Link=https://www.snapeda.com/parts/MTSW-150-22-S-D-415/Samtec/view-part/?ref=snap, MP=MTSW-150-22-S-D-415, Availability="In Stock"
R1 R2 R3: library part R_0402_1005Metric_Pad0.72x0.64mm_HandSolder, "Resistor SMD 0402 (1005 Metric), square (rectangular) end terminal, IPC_7351 nominal with elongated pad for handsoldering. (Body size source: IPC-SM-782 page 72, https://www.pcb-3d.com/wordpress/wp-content/uploads/ipc-sm-782a_amendment_1_and_2.pdf), generated with kicad-footprint-generator", Datasheet=~, Description=Resistor, Website=https://www.digikey.bg/en/products/detail/yageo/RC0805FR-071KL/727444, ki_fp_filters=R_*
SW1 SW2 SW3 SW4: library part switch1, Datasheet=~, Description="SPDT reed switch", Website=https://www.digikey.bg/en/products/detail/e-switch/500SSP1S1M2REA/378941
U1: library part AD7606BSTZ, SNAPEDA_PACKAGE_ID=6381, Package="LQFP -64 Analog Devices", MANUFACTURER="Analog Devices Inc.", MF="Analog Devices", Price=None, Check_prices=https://www.snapeda.com/parts/AD7606BSTZ/Analog+Devices/view-part/?ref=eda, SnapEDA_Link=https://www.snapeda.com/parts/AD7606BSTZ/Analog+Devices/view-part/?ref=snap, MP=AD7606BSTZ, Description_1="\n                        \n                            8-Channel DAS with 16-Bit, Bipolar Input, Simultaneous Sampling ADC\n                        \n", Availability="In Stock"
U2: library part JST_GH_SM08B-GHS-TB_1x08-1MP_P1.25mm_Horizontal, "JST GH series connector, SM08B-GHS-TB (http://www.jst-mfg.com/product/pdf/eng/eGH.pdf), generated with kicad-footprint-generator"
U3: library part PinHeader_1x14_P2.54mm_Vertical, "Through hole straight pin header, 1x14, 2.54mm pitch, single row"
U5: library part JST_GH_SM02B-GHS-TB_1x02-1MP_P1.25mm_Horizontal, "JST GH series connector, SM02B-GHS-TB (http://www.jst-mfg.com/product/pdf/eng/eGH.pdf), generated with kicad-footprint-generator"
VR1: library part TLV70033DDCR, Package="SOT-23-THN-5 Texas Instruments", MF="Texas Instruments", Description_1="\n                        \n                            200-mA, high-PSRR, low-IQ, low-dropout voltage regulator with enable\n                        \n", Price=None, SnapEDA_Link=https://www.snapeda.com/parts/TLV70033DDCR/Texas+Instruments/view-part/?ref=snap, MP=TLV70033DDCR, Availability="In Stock", Check_prices=https://www.snapeda.com/parts/TLV70033DDCR/Texas+Instruments/view-part/?ref=eda

## Via types
v1: diameter 0.6, hole 0.3, F.Cu to B.Cu, tented both sides, 53 vias

## Nets (pads, with @x,y where several pads share a name; then routed paths per layer and width w, separated by ;. In a path a pad name is that pad's centre, name@x,y a point inside that pad or via, vN(x,y) a via of type N, cw(c..) or ccw(c..) an arc to the next point about the centre after c; other vN are vias at no path point)
+3.3V: C5.2 C12.1 SW1.2 SW2.2 SW3.2 SW4.2 U1.23 VR1.5 | length 86.3
  F.Cu w0.25: C5.2 176.15,22.316 U1.23 v1(176.15,26.025) ; C5.2@176.15,22.143 C5.2@176.16,22.153
  F.Cu w0.4: VR1.5@188.447,23.285 C12.1
  B.Cu w0.2: SW1.2 184.025,7.775 188.2,11.95 188.2,22.175 189.3,23.275 v1(189.3,23.285) 188.385,24.2 177.975,24.2 v1(176.15,26.025)
  B.Cu w0.25: v1(189.3,23.285) 190.625,24.61 190.625,30 ; 190.625,25.625 190.625,27.475 190.625,30 ; SW4.2 190.625,30
+5V: C4.2 C8.2 C9.2 C11.1 U1.1 U1.37 U1.38 U1.48 U3.13 U5.1 VR1.1 VR1.3 | length 17.2
  F.Cu w0.2: 182.6,28.95 182.7,28.85
  F.Cu w0.25: C4.2 169.707,35.808 169.707,34.617 170.125,34.2 U1.1 172.25,34.2 v1(172.5,34.45) ; v1(181.25,34.4) 181.45,34.2 U1.48 183.55,34.2 184.068,34.717 C8.2@184.068,35.45 ; 182.7,28.85 C9.2 ; C11.1 183.61,23.275 VR1.1 ; v1@185.62,20.53 VR1.3
  F.Cu w0.4: v1@181.2,28.95 182.6,28.95
  F.Cu w0.5: v1(160.65,43.275) v1(160.65,45.8)
  other v1: 185.63,20.52 184.4,23.275 181.25,28.95
BUSY: U1.14 U3.10 | length 38.1
  F.Cu w0.25: U1.14 172.351,27.7 172.764,27.287 v1(173.3,27.287)
  B.Cu w0.2: U3.10 144.34,18.07 164.034,18.07 173.251,27.287 v1(173.3,27.287)
CONVST: U1.9 U1.10 U3.3 | length 37
  F.Cu w0.25: U1.10 172.2,29.7 172.9,30.4 ; U1.9 172.7,30.2 172.9,30.4 ; v1(173.3,30.488) 172.988,30.488 172.9,30.4
  B.Cu w0.2: U3.3 142.715,34.225 169.125,34.225 172.862,30.488 v1(173.3,30.488)
CS: U1.13 U3.9 | length 37.2
  F.Cu w0.25: U1.13 172.7,28.2 172.813,28.087 v1(173.3,28.087)
  B.Cu w0.2: U3.9 163.634,18.47 173.251,28.087 v1(173.3,28.087)
DB0: J1.1 U1.16 | length 24.7
  F.Cu w0.25: J1.1 171.2,12.55 169.6,14.15 169.6,26.1 170.2,26.7 U1.16
DB1: J1.2 U1.17 | length 21.3
  F.Cu w0.25: J1.2 172,22.75 173.15,23.9 U1.17
DB2: J1.3 U1.18 | length 21.2
  F.Cu w0.25: J1.3 172.8,22.9 173.65,23.75 U1.18
DB3: J1.4 U1.19 | length 21.3
  F.Cu w0.25: J1.4 173.6,18.912 173.298,19.214 173.298,22.748 174.15,23.6 U1.19
DB4: J1.5 U1.20 | length 21.5
  F.Cu w0.25: J1.5 174.4,18.75 173.749,19.401 173.749,22.499 174.65,23.4 U1.20
DB5: J1.6 U1.21 | length 21.7
  F.Cu w0.25: U1.21 175.15,23.25 174.2,22.3 174.2,19.75 175.2,18.75 J1.6
DB6: J1.7 U1.22 | length 21.8
  F.Cu w0.25: U1.22 175.65,23.1 174.69,22.14 174.69,20.06 176,18.75 J1.7
DB7{slash}DOUTA: J1.8 U1.24 | length 21.1
  F.Cu w0.25: U1.24 176.65,23.5 177.06,23.09 177.06,19.01 176.8,18.75 J1.8
DB8DOUTB: J1.9 U1.25 | length 21.1
  F.Cu w0.25: U1.25 177.15,23.7 177.6,23.25 J1.9
DB9: J1.10 U1.27 | length 21
  F.Cu w0.25: U1.27 178.15,16.8 178.4,16.55 J1.10
DB10: J1.11 U1.28 | length 21.1
  F.Cu w0.25: U1.28 178.65,17.496 179.2,16.946 J1.11
DB11: J1.12 U1.29 | length 21.2
  F.Cu w0.25: U1.29 179.15,18.4 180,17.55 J1.12
DB12: J1.13 U1.30 | length 21.3
  F.Cu w0.25: U1.30 179.65,18.9 180.8,17.75 J1.13
DB13: J1.14 U1.31 | length 21.5
  F.Cu w0.25: U1.31 180.15,19.2 181.6,17.75 J1.14
DB14: J1.15 U1.32 | length 21.6
  F.Cu w0.25: U1.32 180.65,19.7 182.4,17.95 J1.15
DB15: J1.16 U1.33 | length 24.8
  F.Cu w0.25: U1.33 181.55,26.7 181.2,26.35 181.2,20.075 183.2,18.075 J1.16
FRSTDATA: U1.15 U3.11 | length 38.9
  F.Cu w0.25: U1.15 172.215,27.2 172.927,26.488 v1(173.3,26.488)
  B.Cu w0.2: U3.11 146.48,17.67 164.482,17.67 v1(173.3,26.488)
GND: C2.1 C3.1 C4.1 C5.1 C6.1 C7.2 C8.1 C9.1 C11.2 C12.2 DNP1.2 SW1.3 SW2.3 SW3.3 SW4.3 U1.2 U1.26 U1.35 U1.40 U1.41 U1.43 U1.46 U1.47 U1.50 U1.52 U1.54 U1.56 U1.58 U1.60 U1.62 U1.64 U3.14 U5.2 VR1.2 | length 32.4
  F.Cu w0.2: v1(172.95,37.575) 173.15,37.375 U1.64 ; v1(174.15,34.8) U1.62 ; v1(175.15,34.8) U1.60 ; v1(176.15,34.8) U1.58 ; v1(177.15,34.8) U1.56 ; v1(178.15,34.8) U1.54 ; v1(179.15,34.8) U1.52 ; v1(180.15,34.8) U1.50
  F.Cu w0.25: U1.2 172.25,33.7 v1(172.5,33.45) ; U1.26 v1(177.65,26.05) ; v1(181.25,30.15) 181.3,30.2 U1.40 ; v1(181.25,30.8) 181.35,30.7 U1.41 ; v1@181.3,27.7 U1.35 ; v1@181.3,31.7 U1.43 ; C11.2@183.72,22.15 v1(184.418,22.15) ; VR1.2 185.63,22.335 v1(186.75,22.335) ; v1(189.305,22.153) v1@189.308,22.15
  F.Cu w0.4: DNP1.2 v1(169.7,27.65) ; v1(170.825,35.025) C4.1 ; v1(181.25,33.35) 181.35,33.45 182.55,33.45 ; v1(182.932,34.95) C8.1 ; v1(184.475,34.225) C7.2 ; C2.1 v1(186.9,27.8) ; C9.1 v1(186.9,28.85) ; C6.1 v1(186.9,29.9) ; v1@189.308,22.15 C12.2
  F.Cu w0.5: v1(159.4,43.275) v1(159.4,45.8) ; v1(175.316,21.165) C5.1
  other v1: 181.25,27.7 181.25,31.7 186.475,32.625 187.2,32.625
Net-(C2-Pad2): C2.2 U1.36 | length 2.5
  F.Cu w0.25: U1.36 183.7,28.2 184.15,27.75 C2.2@184.85,27.75
Net-(C6-Pad2): C6.2 U1.39 | length 2.4
  F.Cu w0.25: U1.39 183.5,29.7 183.7,29.9 C6.2
Net-(U1-OS0): R1.2 SW1.1 U1.3 | length 35.9
  F.Cu w0.2: R1.2 v1(169.175,33.25) 169.225,33.2 U1.3
  F.Cu w0.25: SW1.1 149.975,19.925 156.725,26.675 v1(164.1,26.675)
  B.Cu w0.2: v1(169.175,33.25) 169.188,33.237 v1@169.188,33.213
  B.Cu w0.25: v1(164.1,26.675) 164.1,28.175 v1(169.175,33.25)
Net-(U1-OS1): R2.2 SW2.1 U1.4 | length 30.2
  F.Cu w0.25: SW2.1 157.075,22.5 160.45,25.875 v1(164.1,25.875) ; R2.2 168.423,32.225 v1(169.225,32.225) 169.7,32.7 U1.4
  B.Cu w0.2: v1(164.1,25.875) v1@164.15,25.875 ; v1@169.225,32.126 v1(169.225,32.225)
  B.Cu w0.25: v1@164.15,25.875 164.25,25.875 168.35,29.975 168.35,31.35 v1(169.225,32.225)
Net-(U1-OS2): R3.2 SW3.1 U1.5 | length 24.7
  F.Cu w0.25: v1(164.1,25.075) 164.3,24.875 SW3.1 ; R3.2 168.423,31.225 v1(169.225,31.225) 169.225,31.275 170.15,32.2 U1.5
  B.Cu w0.2: 169.225,30.775 v1(169.225,31.225)
  B.Cu w0.25: v1(164.1,25.075) 164.185,25.075 169.225,30.115 v1(169.225,31.225)
Net-(U1-REF_SELECT): SW4.1 U1.34 | length 12.9
  F.Cu w0.2: SW4.1@191.766,26.441 SW4.1
  F.Cu w0.25: U1.34 183.55,27.2 184.5,26.25 190.7,26.25 192.025,27.575 SW4.1
Net-(U1-REFCAPA): C7.1 U1.44 U1.45 | length 2.9
  F.Cu w0.25: 182.6,32.45 183.55,32.45 184.19,33.09 C7.1
Net-(U1-SER{slash}BYTE_SEL{slash}{\P\A\R\}\)\: DNP1.1 R4.2 U1.6 | length 5.5
  F.Cu w0.25: DNP1.1@168.99,29.65 170,30.66 170,31.35 170.35,31.7 U1.6
  F.Cu w0.8: R4.2 DNP1.1
OS0: R1.1 U3.6 | length 28
  F.Cu w0.25: U3.6 149.36,33.25 R1.1
OS1: R2.1 U3.7 | length 28.6
  F.Cu w0.25: U3.7 150.9,32.25 R2.1
OS2: R3.1 U3.8 | length 29.2
  F.Cu w0.25: U3.8 152.44,31.25 R3.1
RANGE: U1.8 U3.2 | length 35.2
  F.Cu w0.25: U1.8 172.35,30.7 172.9,31.25 173,31.25
  B.Cu w0.2: U3.2 167.8,36.25 172.762,31.288 v1(173.3,31.288)
REFIN{slash}REFOUT: C3.2 U1.42 | length 2.5
  F.Cu w0.25: U1.42 184.763,31.2 C3.2@185.013,31.45
RST: U1.11 U3.4 | length 38.7
  F.Cu w0.25: U1.11 172.351,29.2 172.801,29.65 v1@173.263,29.65
  B.Cu w0.2: U3.4 149.395,23.975 167.225,23.975 172.937,29.687 v1(173.3,29.687)
SCLK{slash}RD: U1.12 U3.5 | length 37.8
  F.Cu w0.25: U1.12 172.7,28.7 172.887,28.887 v1(173.3,28.887)
  B.Cu w0.2: U3.5 147.53,23.3 167.25,23.3 172.837,28.887 v1(173.3,28.887)
SER{slash}BYTE_SEL{slash}PAR: R4.1 U3.12 | length 34.1
  F.Cu w0.25: U3.12 144.4,13.05 144.4,17.85 154.2,27.65 R4.1
STBY: U1.7 U3.1 | length 36
  F.Cu w0.25: U1.7 172.15,31.2 173,32.05
  B.Cu w0.2: U3.1 143.64,37.35 167.4,37.35 172.662,32.088 v1(173.3,32.088)
V1: U1.49 U2.1 | length 8.8
  F.Cu w0.2: U1.49 180.65,37.9 181.375,38.625 U2.1
V2: U1.51 U2.2 | length 8.7
  F.Cu w0.2: U1.51 179.65,37.925 180.125,38.4 U2.2
V3: U1.53 U2.3 | length 8.6
  F.Cu w0.2: U1.53 178.7,36.18 178.7,38.15 178.875,38.325 U2.3
V4: U1.55 U2.4 | length 8.5
  F.Cu w0.2: U2.4 177.65,44.625 U1.55
V5: U1.57 U2.5 | length 8.6
  F.Cu w0.2: U2.5 176.375,38.3 176.65,38.025 U1.57
V6: U1.59 U2.6 | length 8.7
  F.Cu w0.2: U2.6 175.125,38.875 175.65,38.35 U1.59
V7: U1.61 U2.7 | length 8.8
  F.Cu w0.2: U2.7 173.875,38.825 174.65,38.05 U1.61
V8: U1.63 U2.8 | length 8.9
  F.Cu w0.2: U2.8 172.625,38.9 173.65,37.875 U1.63
pads on no net: H1.Un1 H2.Un1 H3.Un1 J1.MP U2.MP U5.MP VR1.4
copper on no net: | length 684.5
  F.Cu w0.254: 181.8,32.15 183.3,32.15 183.3,32.75 181.8,32.75 181.8,32.15 ; 181.8,33.15 183.3,33.15 183.3,33.75 181.8,33.75 181.8,33.15 ; 181.9,28.65 183.3,28.65 183.3,29.25 181.9,29.25 181.9,28.65 ; 185.075,20.3 186.15,20.3 186.15,21.575 185.075,21.575 185.075,20.3 ; 186.25,30.725 187.5,30.725 187.5,32.925 186.25,32.925 186.25,30.725
  F.SilkS w0.254: 139.475,0.35 199,0.35 199,50.4 139.475,50.4 139.475,0.35
  B.SilkS w0.254: 139.5,0.25 199,0.25 199,50.45 139.5,50.45 139.5,0.25
  Edge.Cuts w0.254: 139.125,0 199.325,0 199.325,50.75 139.125,50.75 139.125,0

## Polygon pours and split planes (outlines as drawn)
GND on In1.Cu "In1.Cu-GND" (solid, remove dead copper, pour order 0): 139.654,50.447 198.8,50.55 198.8,0 139.941,0.15
+5V on In2.Cu "In2.Cu-+5V" (solid, remove dead copper, pour order 1): 139.546,50.5 198.8,50.55 198.806,0.35 139.945,0.65